# EAGLE board Anemometro_08_05 (EAGLE 4.09)
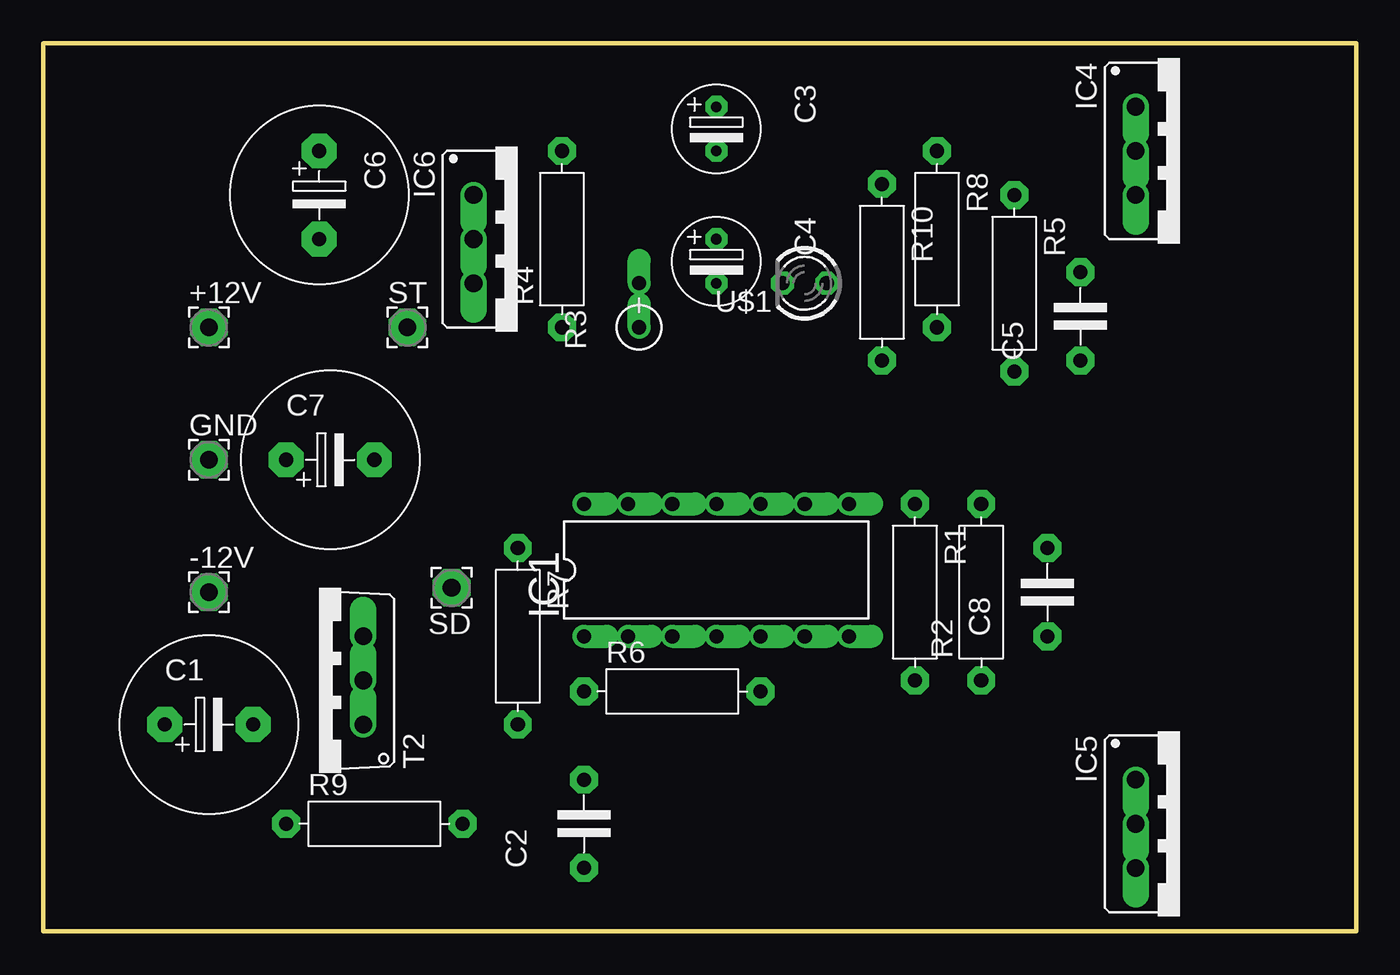
[diagram p0: board, top side]
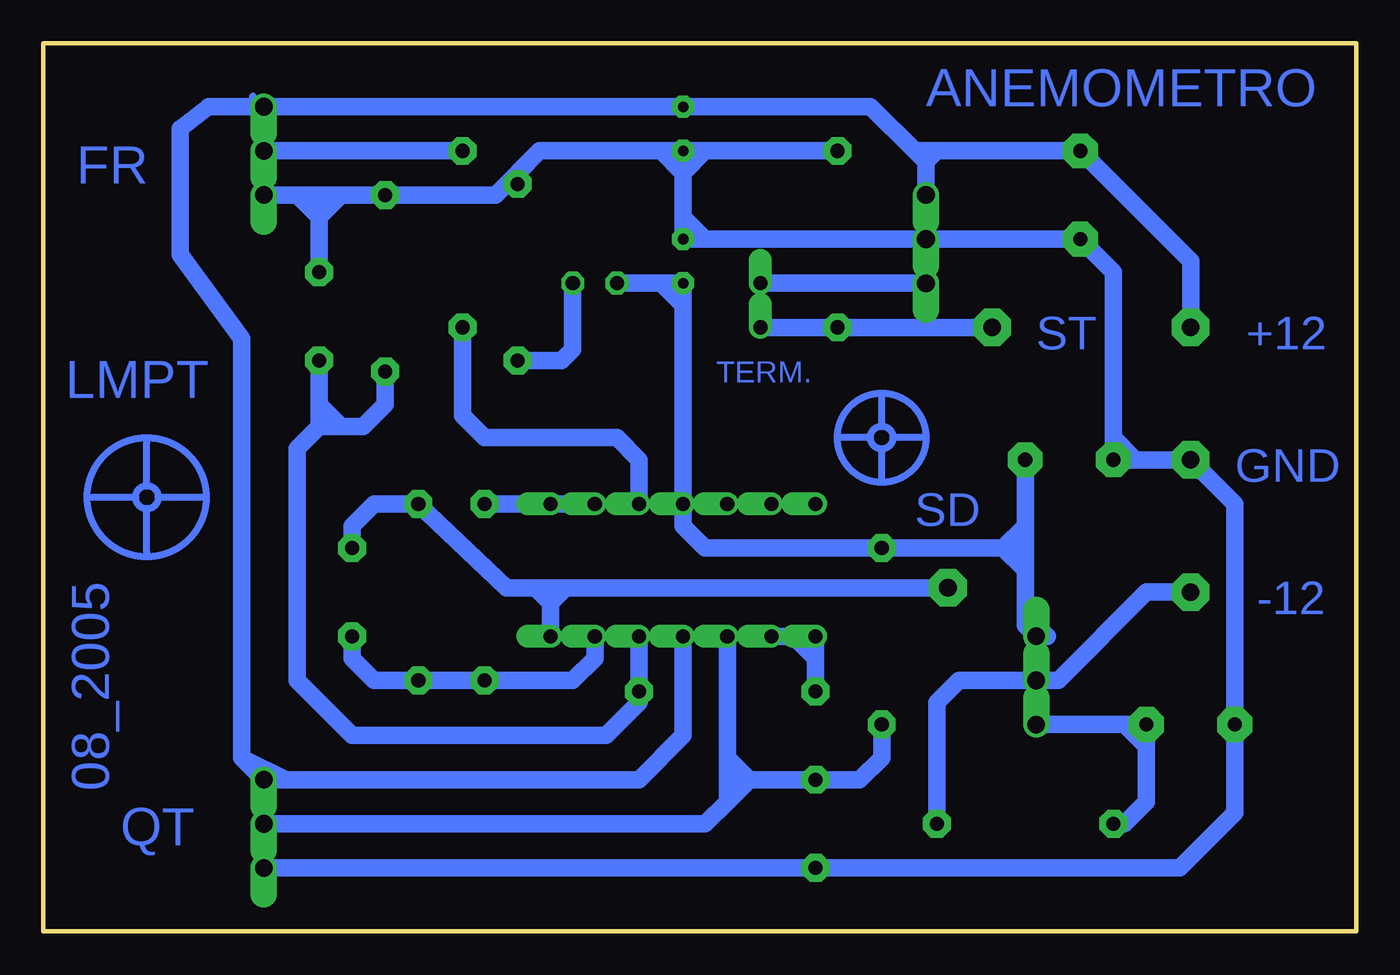
[diagram p1: board, bottom side, seen from below]

Size 75.55 x 51.11 mm. Coordinates in mm from the lower left corner, seen from the top.
Outline: 0,0 75.55,0 75.55,51.11 0,51.11 0,0
Copper layers used: Bottom

## Footprints (pad centres in the part's own frame; a part is rotated, then mirrored left to right if it is on the bottom)
2,15/1,0 = drill 1.016 pad 2.159 octagon: 1 0,0
ES-5 = drill 0.813 pad 2.007 octagon: 1 -2.54,0; 2 2.54,0
C-5 = drill 0.813 pad 1.6 octagon: 1 -2.54,0; 2 2.54,0
ES-2,5L = drill 0.61 pad 1.27 octagon: 1 0,0; 2 2.54,0
DIL14 = drill 0.813 offset: 1 -7.62,-3.81; 2 -5.08,-3.81; 3 -2.54,-3.81; 4 0,-3.81; 5 2.54,-3.81; 6 5.08,-3.81; 7 7.62,-3.81; 8 7.62,3.81; 9 5.08,3.81; 10 2.54,3.81; 11 0,3.81; 12 -2.54,3.81; 13 -5.08,3.81; 14 -7.62,3.81
78XXS = drill 1.016 offset: GND 0,-2.54; IN -2.54,-2.54; OUT 2.54,-2.54
R-10 = drill 0.813 pad 1.6 octagon: 1 -5.08,0; 2 5.08,0
RS-2,5 = drill 0.813 offset: 1 -1.27,0; 2 1.27,0
TO220AV = drill 1.016 offset: B -2.54,-2.54; C 0,-2.54; E 2.54,-2.54
LED3MM = drill 0.813 octagon: A -1.27,0; K 1.27,0

## Placement (x,y rotation side)
+12V  [2,15/1,0]  9.52,34.76 0 top
-12V  [2,15/1,0]  9.52,19.52 0 top
C1  470u  [ES-5]  9.52,11.9 0 top
C2  3n3  [C-5]  31.11,6.19 90 top
C3  10uF  [ES-2,5L]  38.73,47.46 270 top
C4  10uF  [ES-2,5L]  38.73,39.84 270 top
C5  470n  [C-5]  59.69,35.4 90 top
C6  100uF  [ES-5]  15.87,42.38 270 top
C7  100uF  [ES-5]  16.5,27.14 0 top
C8  470n  [C-5]  57.78,19.52 90 top
GND  [2,15/1,0]  9.52,27.14 0 top
IC1  TL084P  [DIL14]  38.73,20.79 0 top
IC4  LM35_Frio  [78XXS]  65.4,44.92 270 top
IC5  LM35_Quente  [78XXS]  65.4,6.19 270 top
IC6  7805  [78XXS]  27.3,39.84 270 top
R1  1k5  [R-10]  50.16,19.52 270 top
R2  30k  [R-10]  53.97,19.52 90 top
R3  THERMISTOR-30k  [RS-2,5]  34.28,36.03 90 top
R4  30k  [R-10]  29.84,39.84 90 top
R5  30k  [R-10]  55.88,37.3 270 top
R6  1k5  [R-10]  36.19,13.8 0 top
R7  2k  [R-10]  27.3,16.98 270 top
R8  30k  [R-10]  51.43,39.84 270 top
R9  1k5  [R-10]  19.04,6.19 0 top
R10  1k2  [R-10]  48.26,37.94 270 top
SD  [2,15/1,0]  23.49,19.77 180 top
ST  [2,15/1,0]  20.95,34.76 0 top
T2  TIP107  [TO220AV]  15.87,14.44 90 top
U$1  [LED3MM]  43.81,37.3 180 top

## Library data of the parts
+12V -12V GND SD ST = wirepad
C1-C8 R1 R2 R4-R10 = discrete
IC1 = linear
IC4-IC6 = v-reg
R3 = varistor
T2 = transistor-power
U$1 = led

## Nets
+5V: IC6.OUT R3.2
+12V: +12V.1 C3.1 C6.1 IC1.4 IC4.IN IC5.IN IC6.IN
-12V: C4.2 C7.2 IC1.11 R7.1 T2.E U$1.K
GND: C1.1 C2.1 C3.2 C4.1 C5.2 C6.2 C7.1 GND.1 IC4.OUT IC5.OUT IC6.GND R4.2 R5.1 R10.1
N$1: -12V.1 R9.2 T2.C
N$2: C8.1 IC1.6 R1.2 R2.1
N$3: C5.1 IC1.5 R5.2 R6.2
N$4: IC4.GND R8.1
N$5: R3.1 R4.1 ST.1
N$6: C2.2 IC1.3 IC5.GND R7.2
N$7: IC1.8 IC1.9 R1.1
N$8: C1.2 R9.1 T2.B
N$11: IC1.1 IC1.2 R6.1
N$13: IC1.10 R8.2
S$1: R10.2 U$1.A
SD: C8.2 IC1.7 R2.2 SD.1

## Tracks (layer width: path | path; a pad name or v marks a point on that pad's centre or on a via)
+5V
  Bottom 1.016: IC6.OUT R3.2
+12V
  Bottom 0.406: C3.1 63.5,47.46 63.5,48.09
  Bottom 1.016: 63.5,47.46 66.03,47.46 67.69,46.19 67.69,38.95 64.13,34.12 64.13,10 | 63.5,47.46 IC4.IN | 64.13,10 61.59,8.72 60.95,8.72 | 64.13,10 IC5.IN 60.95,8.72 | IC1.4 38.73,11.27 41.27,8.72 60.95,8.72 | 37.46,47.46 34.79,47.46 | 37.46,47.46 27.93,47.46 25.39,44.92 | 37.46,47.46 C3.1 | 24.76,44.29 IC6.IN | 24.76,44.29 25.39,44.92 | 24.12,44.92 24.76,44.29 | 24.12,44.92 25.39,44.92 | 24.12,44.92 C6.1 9.52,38.57 +12V.1 | 37.46,47.46 63.5,47.46
-12V
  Bottom 1.016: 19.04,22.06 19.04,23.33 | 19.04,23.33 C7.2 | T2.E 19.04,17.61 19.04,18.25 | 19.04,18.25 19.04,20.79 | 19.04,20.79 19.04,22.06 | 19.04,22.06 20.31,22.06 | 20.31,22.06 R7.1 37.46,22.06 38.73,23.33 IC1.11 38.73,36.03 | 38.73,36.03 C4.2 40,37.3 | 40,37.3 U$1.K | 20.31,22.06 19.04,23.33 | 19.04,20.79 20.31,22.06 | 19.04,18.25 17.77,16.98 | 38.73,36.03 40,37.3
GND
  Bottom 1.016: 40,44.92 46.98,44.92 | 37.46,44.92 R4.2 | C3.2 40,44.92 | C3.2 37.46,44.92 | 38.73,43.65 C3.2 | 38.73,43.65 37.46,44.92 | 38.73,43.65 40,44.92 | 38.73,41.11 38.73,43.65 | 38.73,41.11 C4.1 37.46,39.84 | 37.46,39.84 38.73,41.11 | 37.46,39.84 IC6.GND C6.2 13.96,37.94 13.96,28.41 | 13.96,28.41 C7.1 12.7,27.14 | 12.7,27.14 13.96,28.41 | 12.7,27.14 GND.1 6.98,24.6 C1.1 6.98,6.82 10.15,3.65 28.57,3.65 | 28.57,3.65 30.47,3.65 | R10.1 48.26,43.65 46.98,44.92 | C5.2 59.69,41.11 | 60.95,42.38 IC4.OUT | 59.69,41.11 60.95,42.38 | 60.95,42.38 59.69,42.38 | 59.69,41.11 59.69,42.38 | 59.69,42.38 58.41,42.38 | 60.95,42.38 58.41,42.38 | 59.69,41.11 58.41,42.38 | 58.41,42.38 R5.1 49.52,42.38 | 49.52,42.38 48.89,43.02 | 46.98,44.92 49.52,42.38 | 28.57,3.65 C2.1 IC5.OUT
N$1
  Bottom 1.016: -12V.1 12.06,19.52 17.14,14.44 T2.C 22.86,14.44 24.12,13.17 R9.2
N$2
  Bottom 1.016: IC1.6 43.81,15.71 45.08,14.44 R1.2 R2.1 56.51,14.44 57.78,15.71 C8.1
N$3
  Bottom 1.016: 55.24,11.27 43.17,11.27 41.27,13.17 IC1.5 R6.2 | 55.24,11.27 56.51,11.27 | 55.24,11.27 57.78,11.27 60.95,14.44 60.95,27.77 59.69,29.04 | R5.2 55.88,30.31 57.14,29.04 58.41,29.04 | 59.69,29.04 58.41,29.04 | 59.69,30.31 C5.1 | 59.69,29.04 59.69,30.31 | 58.41,29.04 59.69,30.31
N$4
  Bottom 1.016: R8.1 IC4.GND
N$5
  Bottom 1.016: R3.1 R4.1 ST.1
N$6
  Bottom 1.016: IC5.GND 37.46,6.19 36.19,7.46 | 36.19,8.72 36.19,10 | 36.19,10 36.19,16.34 | 36.19,16.34 IC1.3 | 34.92,8.72 36.19,8.72 | 36.19,8.72 36.19,7.46 | 34.92,8.72 36.19,7.46 | 34.92,8.72 36.19,10 | C2.2 34.92,8.72 | C2.2 36.19,8.72 | 36.19,8.72 36.19,16.34 | C2.2 28.57,8.72 27.3,10 R7.2
N$7
  Bottom 1.016: IC1.9 IC1.8 R1.1
N$8
  Bottom 1.016: 13.33,11.9 T2.B | 13.33,11.9 C1.2 12.06,11.27 | 12.06,11.27 12.06,10.63 13.33,11.9 | R9.1 13.33,6.19 12.06,7.46 12.06,11.27
N$9
  Bottom 0.406: 27.3,29.04 27.3,30.95
N$11
  Bottom 1.016: 32.38,16.98 IC1.2 | 32.38,16.98 IC1.1 31.11,15.71 | R6.1 31.11,15.71 | 31.11,15.71 32.38,16.98
N$12
  Bottom 0.406: 24.76,28.41 26.66,28.41
N$13
  Bottom 1.016: IC1.10 41.27,27.14 42.54,28.41 50.16,28.41 51.43,29.68 R8.2
N$14
  Bottom 0.406: 27.93,28.41 29.84,28.41
N$15
  Bottom 0.406: 27.3,25.87 27.3,27.77
N$16
  Bottom 0.406: 66.42,24.98 68.96,24.98
N$17
  Bottom 0.406: 69.59,25.62 69.59,28.16
N$18
  Bottom 0.406: 70.23,24.98 72.77,24.98
N$19
  Bottom 0.406: 69.59,21.81 69.59,24.35
S$1
  Bottom 1.016: 45.08,34.76 U$1.A 45.08,33.49 45.71,32.85 R10.2
SD
  Bottom 1.016: 46.35,19.77 48.89,19.77 R2.2 56.51,24.6 57.78,23.33 C8.2 | 46.35,19.77 46.35,18.88 | 46.35,18.88 IC1.7 | SD.1 46.35,19.77 | 46.35,18.88 46.98,19.52 | 46.35,18.88 45.71,19.52
(copper drawn outside any net)
  shapes: Bottom circle x4

## Text on the board
Bottom: ANEMOMETRO | FR | +12 | ST | LMPT | TERM. | GND | SD | -12 | 08_2005 | QT